# EAGLE board DC-DC Converter Module V2 (EAGLE 9.2.2)
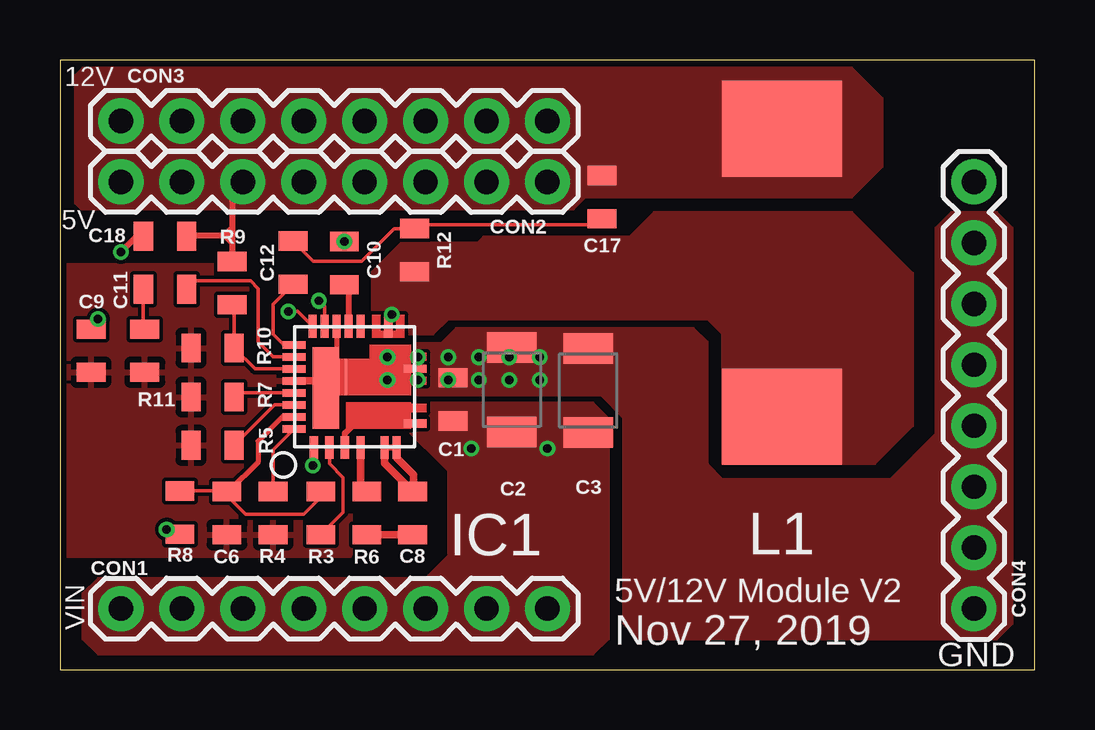
[diagram p0: board, top side]
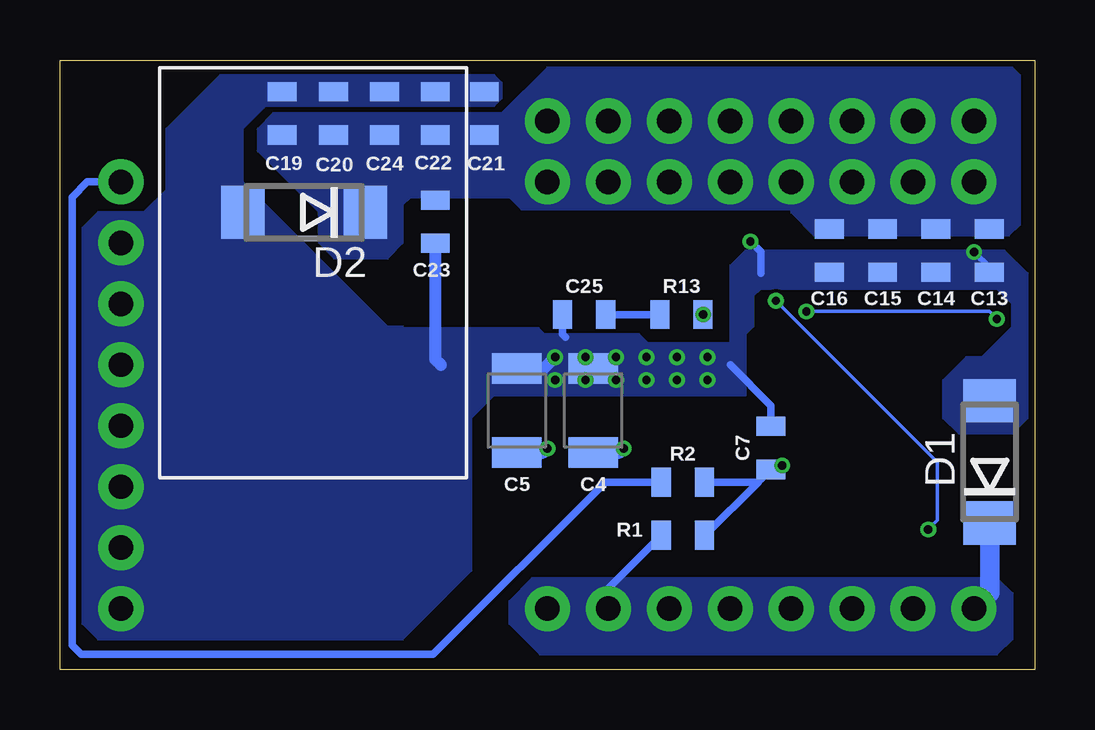
[diagram p1: board, bottom side, seen from below]

Size 40.64 x 25.4 mm. Coordinates in mm from the lower left corner, seen from the top.
Outline: 0,0 40.64,0 40.64,25.4 0,25.4 0,0
Copper layers (1*16): Top 0.035mm / dielectric 1.5mm / Bottom 0.035mm
Design rules "JLCPCB2Layer": minimum track width 6mil, minimum drill 10mil, track to track 6mil, track to pad 6mil, pad to pad 6mil, via to via 6mil, smd to smd 0mil, copper to edge 10mil, drill to drill 10mil, minimum pad ring 6mil, minimum via ring 6mil, stop-mask expansion 2mil, vias tented up to drill 100mil, thermal gap 10mil

## Footprints (pad centres in the part's own frame; a part is rotated, then mirrored left to right if it is on the bottom)
0805 = smd 0.8 x 1.2: 1 -0.9,0; 2 0.9,0
1210 = smd 1.27 x 2.06: 1 -1.755,0; 2 1.755,0
1X08 = drill 1.016 pad 1.88: 1 0,0; 2 2.54,0; 3 5.08,0; 4 7.62,0; 5 10.16,0; 6 12.7,0; 7 15.24,0; 8 17.78,0
DO214AA = smd 1.8 x 2.2: A 2.55,0; C -2.55,0
MLP55-27L = smd 0.95 x 0.35: 1 -0.025,4.2; 2 -0.025,3.55; 3 -0.025,2.9; 4 -0.025,2.25; 12/13/14 5.025,1.1 | smd 0.95 x 0.32: 5 -0.025,1.25; 6 -0.025,0.75; 15 5.025,2.25; 16 5.025,2.75; 17 5.025,3.25; 18 5.025,3.75; 19 5.025,4.25 | smd 0.35 x 0.95: 7/8 0.975,-0.025; 9/10/11/30 3.255,-0.025 | smd 0.32 x 0.95: 20 4.25,5.025; 21 3.75,5.025; 22 3.25,5.025; 23 2.75,5.025; 24 2.25,5.025; 25 1.75,5.025; 26 1.25,5.025; 27 0.75,5.025 | smd 3.4 x 1.1: 28 2.45,3.7
AGND_JUMPER_MLP55 = smd 1.52 x 0.1: P$1 0,0; P$2 0,-0.3
INDUCTOR_BOURNS_SRP1265A = smd 4 x 5: 1 0,0; 2 12,0

## Placement (x,y rotation side)
C1  0.1uF/50V  [0805]  16.38,11.26 270 top
C2  10uF/50V  [1210]  18.84,11.66 90 top
C3  10uF/50V  [1210]  22.02,11.63 90 top
C4  10uF/50V  [1210]  18.41,10.79 90 bottom
C5  10uF/50V  [1210]  21.59,10.79 90 bottom
C6  1uF  [0805]  6.96,6.52 270 top
C7  0.1uF/50V  [0805]  11,9.24 90 bottom
C8  1uF  [0805]  14.7,6.52 90 top
C9  [0805]  1.3,13.29 90 top
C10  4.7uF/25V  [0805]  11.86,16.94 90 top
C11  [0805]  4.38,15.85 0 top
C12  [0805]  9.71,16.95 90 top
C13  22uF/25V  [0805]  1.91,17.46 90 bottom
C14  22uF/25V  [0805]  4.13,17.46 90 bottom
C15  22uF/25V  [0805]  6.35,17.46 90 bottom
C16  22uF/25V  [0805]  8.57,17.46 90 bottom
C17  [0805]  22.59,19.68 270 top
C18  0.1uF/50V  [0805]  4.38,18.05 0 top
C19  22uF/25V  [0805]  31.39,23.18 270 bottom
C20  22uF/25V  [0805]  29.23,23.18 270 bottom
C21  22uF/25V  [0805]  22.95,23.18 270 bottom
C22  22uF/25V  [0805]  24.99,23.18 270 bottom
C23  22uF/25V  [0805]  24.99,18.66 90 bottom
C24  22uF/25V  [0805]  27.11,23.18 270 bottom
C25  [0805]  18.79,14.8 0 bottom
CON1  1X08  [1X08]  2.54,2.54 0 top
CON2  1X08  [1X08]  2.54,20.32 0 top
CON3  1X08  [1X08]  2.54,22.86 0 top
CON4  1X08  [1X08]  38.1,2.54 90 top
D1  [DO214AA]  1.89,8.65 90 bottom
D2  [DO214AA]  30.46,19.05 180 bottom
IC1  BUCK_SIC472  [MLP55-27L]  14.78,9.28 90 top
J1  AGND_JUMPER_MLP55  [AGND_JUMPER_MLP55]  11.91,12.19 270 top
L1  10uH  [INDUCTOR_BOURNS_SRP1265A]  30.09,10.53 90 top
R1  0  [0805]  14.68,5.6 0 bottom
R2  0  [0805]  14.68,7.81 0 bottom
R3  100k  [0805]  10.87,6.52 90 top
R4  300k  [0805]  8.88,6.52 270 top
R5  62k  [0805]  6.36,9.34 0 top
R6  3.3  [0805]  12.79,6.52 270 top
R7  180k/82k  [0805]  6.36,11.35 0 top
R8  0  [0805]  5,6.54 270 top
R9  [0805]  7.18,16.1 90 top
R10  [0805]  6.36,13.4 180 top
R11  [0805]  3.54,13.29 270 top
R12  [0805]  14.78,17.48 90 top
R13  [0805]  14.73,14.8 0 bottom

## Library data of the parts
C1-C25 L1 R1-R13 = EcoCar-Passives
CON1-CON4 = EcoCar-Connectors-2.54mm
D1 D2 = EcoCar-Fuses-Protection
IC1 = EcoCar-Integrated-Circuits
J1 = EcoCar-Miscellaneous

## Nets
5V: CON4.8 R2.1
AGND: C6.2 C9.1 IC1.23 IC1.28 J1.P$2 R4.2 R5.1 R7.1 R10.2 R11.2
COMP: C11.2 IC1.21
FEEDBACK: IC1.22 R9.1 R10.1
GND: C1.1 C2.2 C3.2 C4.2 C5.2 C7.2 C10.2 C13.1 C14.1 C15.1 C16.1 C18.1 C19.1 C20.1 C21.1 C22.1 C23.1 C24.1 C25.1 CON4.1 CON4.2 CON4.3 CON4.4 CON4.5 CON4.6 CON4.7 D1.A D2.A IC1.9/10/11/30 IC1.17 J1.P$1
MODE: IC1.27 R4.1
N$1: IC1.2 R3.1
N$4: C11.1 R11.1
N$5: C10.1 IC1.16
N$6: IC1.18 R8.2
N$7: IC1.4 R6.1
N$8: C8.2 IC1.5 IC1.6
N$9: C8.1 R6.2
N$10: C9.2 IC1.19
N$11: IC1.24 R7.2
N$15: IC1.25 R5.2
N$16: C25.2 R13.1
N$19: C12.2 C17.2 R12.2
SW: IC1.12/13/14 L1.1 R12.1 R13.2
VCC: C13.2 C14.2 C15.2 C16.2 C17.1 C18.2 C19.2 C20.2 C21.2 C22.2 C23.2 C24.2 CON2.1 CON2.2 CON2.3 CON2.4 CON2.5 CON2.6 CON2.7 CON2.8 CON3.1 CON3.2 CON3.3 CON3.4 CON3.5 CON3.6 CON3.7 CON3.8 D2.C L1.2 R9.2
VCIN: C7.1 IC1.1 R1.2 R2.2
VDD: C6.1 IC1.26 R3.2 R8.1
VIN: C1.2 C2.1 C3.1 C4.1 C5.1 CON1.1 CON1.2 CON1.3 CON1.4 CON1.5 CON1.6 CON1.7 CON1.8 D1.C IC1.3 IC1.7/8 R1.1
VSNS: C12.1 IC1.20

## Tracks (layer width: path | path; a pad name or v marks a point on that pad's centre or on a via)
5V
  Bottom 0.305: R2.1 17.91,7.81 25.08,0.64 39.75,0.64 40.13,1.02 40.13,19.68 39.5,20.32 CON4.8
AGND
  Top 0.102: IC1.28 11.54,12.19 J1.P$2
  Top 0.305: IC1.23 11.08,12.03 IC1.28
  pour Top: 9.84,14.29 9.84,9.21 11.75,9.21 12.06,9.21 12.06,4.76 0.32,4.76 0.32,16.83 10.79,16.83 10.79,14.29
COMP
  Top 0.152: IC1.21 8.88,13.03 8.26,13.65 8.26,15.88 7.94,16.19 5.62,16.19 C11.2
FEEDBACK
  Top 0.152: IC1.22 8.13,12.53 R10.1 7.26,15.12 R9.1
GND  (via drill 0.35)
  Top 0.152: J1.P$1 12.08,12.36 12.26,12.54 IC1.9/10/11/30
  Top 0.203: IC1.17 11.53,12.92 12.08,12.36
  Top 0.254: C18.1 3.19,18.05 v2.54,17.4
  Top 0.305: 19.13,13.41 C2.2
  Bottom 0.254: v2.54,17.4 1.91,16.76 C13.1
  Bottom 0.305: 19.94,14.5 C25.1 19.69,13.98 19.56,13.84 | C7.2 11,11 12.7,12.7 | C10.2 11.43,17.41 11.43,16.51
  Bottom 0.508: C4.2 17.93,12.55 v17.46,13.02 | C5.2 20.47,12.55 v20,13.02 | C23.1 24.99,12.93 24.77,12.7
  other vias: 11.86,17.84 13.65,13.02 13.65,12.06 14.92,13.02 14.92,12.06 16.19,13.02 16.19,12.06 18.73,12.06 18.73,13.02 20,12.06 17.46,12.06
  pour Top (no thermals): 12.95,13.59 15.88,13.59 16.51,14.22 26.42,14.22 26.99,13.65 26.99,8.57 27.62,7.94 34.61,7.94 36.51,9.84 36.51,13.02 36.51,18.41 37.15,19.05 39.05,19.05 39.69,18.41 39.69,1.91 39.05,1.27 24.13,1.27 23.5,1.91 23.5,10.48 22.54,11.43 13.02,11.43 13.02,13.53
  pour Bottom (no thermals): 36.51,18.41 37.15,19.05 39.05,19.05 39.69,18.41 39.69,1.91 39.05,1.27 26.35,1.27 23.5,4.13 23.5,10.48 22.54,11.43 12.7,11.43 12.7,13.59 16.13,13.59 16.51,13.97 20.45,13.97 20.7,14.22 26.42,14.22 27.05,13.59 27.05,8.51 27.56,8 34.67,8 36.51,9.84
  pour Bottom (no thermals): 13.34,13.59 12.7,13.59 12.7,16.83 12.06,17.46 1.27,17.46 0.32,16.51 0.32,10.48 0.95,9.84 3.17,9.84 3.81,10.48 3.81,12.06 2.86,13.02 2.22,13.02 0.95,14.29 0.95,15.24 1.59,15.88 11.43,15.88 11.75,15.56 11.75,14.29 12.06,13.97 12.06,11.43 13.34,11.43
  pour Bottom (no thermals): 22.23,23.81 22.54,23.5 32.07,23.5 33.02,22.54 33.02,21.27 33.02,20.32 26.99,14.29 26.35,14.29 26.35,8.57 27.3,7.62 35.88,7.62 37.15,8.89 37.15,19.05 36.2,20 36.2,22.54 33.97,24.77 22.86,24.77 22.54,24.77 22.23,24.45
MODE
  Top 0.152: IC1.27 8.88,9.16 R4.1
N$1
  Top 0.152: R3.1 11.81,6.56 11.81,8 11.23,8.58 IC1.2
N$4
  Top 0.152: R11.1 3.48,14.25 C11.1
N$5
  Top 0.254: C10.1 12.03,15.87 IC1.16
N$6  (via drill 0.35)
  Top 0.152: IC1.18 11.03,15.13 v10.79,15.37 | v4.45,5.84 4.64,5.64 R8.2
  Bottom 0.152: v10.79,15.37 4.06,8.64 4.06,6.22 v4.45,5.84
N$7
  Top 0.305: IC1.4 12.53,7.68 R6.1
N$8
  Top 0.254: IC1.5 IC1.6
  Top 0.305: IC1.5 13.53,8.59 C8.2 14.73,7.45 14.73,8.13 14.03,8.83 IC1.6
N$9
  Top 0.305: R6.2 C8.1
N$10  (via drill 0.35)
  Top 0.152: IC1.19 9.91,14.92 v9.53,14.92 | v1.59,14.61 1.3,14.31 C9.2
  Bottom 0.152: v9.53,14.92 1.91,14.92 v1.59,14.61
N$11
  Top 0.152: IC1.24 7.44,11.53 R7.2
N$15
  Top 0.152: IC1.25 8.95,11.03 R5.2
N$16
  Bottom 0.305: C25.2 17.87,14.72 17.87,14.8 R13.1
N$19
  Top 0.152: C12.2 10.55,17.02 12.57,17.02 13.93,18.38 R12.2 14.95,18.54 22.35,18.54 C17.2
SW  (via drill 0.35)
  Top 0.254: IC1.12/13/14 13.68,14.8 R13.2
  other vias: 13.83,14.8
  pour Top (no thermals): 13.02,13.97 15.24,13.97 15.56,13.97 16.19,14.61 26.99,14.61 27.62,13.97 27.62,8.57 32.38,8.57 33.97,8.57 35.56,10.16 35.56,16.51 33.02,19.05 24.77,19.05 23.75,18.03 17.65,18.03 17.4,17.78 14.22,17.78 13.02,16.57
VCC
  Top 0.254: CON2.3 7.18,19.88 7.18,18.41 | 7.18,18.41 7.18,18.1 | 7.18,18.1 7.18,17.78 | 7.18,17.78 R9.2 | C18.2 5.32,18.1 6.35,18.1 6.86,18.1 | 6.86,18.1 7.18,18.1 | 7.18,18.41 6.86,18.1 | 6.86,18.1 7.18,17.78 | L1.2 29.76,22.86 | 22.59,20.59 C17.1
  pour Top (no thermals): 0.89,19.18 21.4,19.18 21.91,19.68 33.02,19.68 34.29,20.95 34.29,23.81 33.02,25.08 0.95,25.08 0.64,24.77 0.64,19.43
  pour Bottom (no thermals): 0.64,24.77 0.95,25.08 20.32,25.08 22.23,23.18 31.75,23.18 32.38,22.54 32.38,21.59 29.84,19.05 29.84,17.78 29.21,17.14 26.99,17.14 26.35,17.78 26.35,18.41 26.35,19.37 26.04,19.68 21.91,19.68 21.4,19.18 21.08,19.18 0.83,19.18 0.64,19.37
  pour Bottom (no thermals): 0.64,19.37 0.64,18.54 1.08,18.1 9.21,18.1 10.16,19.05 10.16,19.37 9.84,19.68 0.95,19.68
VCIN  (via drill 0.35)
  Top 0.305: IC1.1 10.58,8.55 v10.54,8.51
  Bottom 0.305: v10.54,8.51 10.71,8.34 C7.1 11.42,7.92 11.53,7.81 | 11.53,7.81 R2.2 | 11.53,7.81 13.74,5.6 R1.2
VDD
  Top 0.152: C6.1 6.96,7.27 | 6.96,7.27 7.75,6.48 10.16,6.48 10.87,7.19 R3.2 | 6.96,7.27 6.78,7.45 R8.1
  Top 0.203: IC1.26 9.26,10.53 8.26,9.53 8.26,8.64 7.04,7.42 C6.1
VIN  (via drill 0.35)
  Top 0.254: IC1.3 11.88,9.85 12.83,10.79
  Bottom 0.305: R1.1 17.78,3.4 CON1.7
  Bottom 0.508: C4.1 17.31,9.04 v17.14,9.21 | C5.1 20.49,9.04 v20.32,9.21
  Bottom 0.813: D1.C 1.89,3.19 CON1.1
  pour Top (no thermals): 12.06,11.11 22.23,11.11 22.86,10.48 22.86,9.21 22.86,1.27 22.23,0.64 1.59,0.64 0.95,1.27 0.95,3.17 1.59,3.81 15.24,3.81 16.19,4.76 16.19,8.26 14.29,10.16 12.06,10.16
  pour Bottom (no thermals): 0.95,3.17 1.59,3.81 20.95,3.81 21.91,2.86 21.91,1.91 20.64,0.64 1.59,0.64 0.95,1.27
VSNS
  Top 0.152: C12.1 8.89,15.23 8.89,13.97 9.33,13.53 IC1.20

## Text on the board
tPlace: 12V | 5V | 5V/12V Module V2 | VIN | Nov 27, 2019 | GND